# EAGLE board RHD2164_LSS4_AmpAccel (EAGLE 9.3.2)
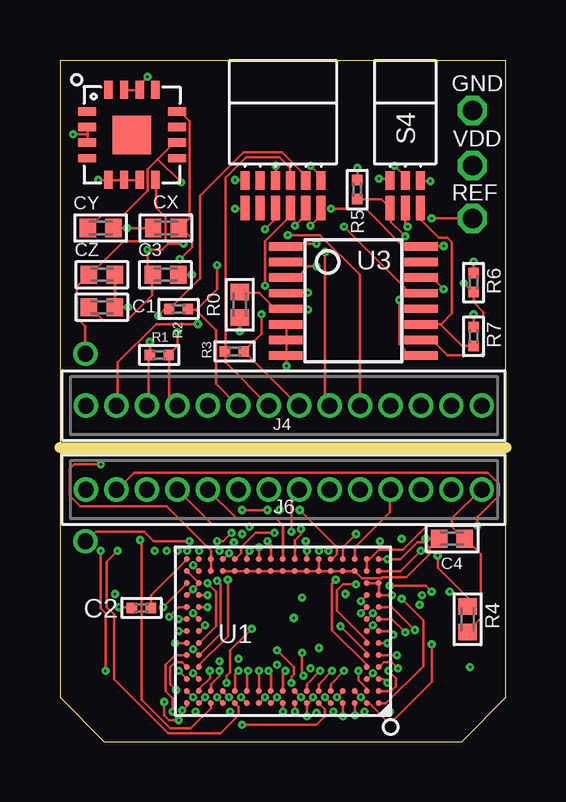
[diagram p0: board, top side]
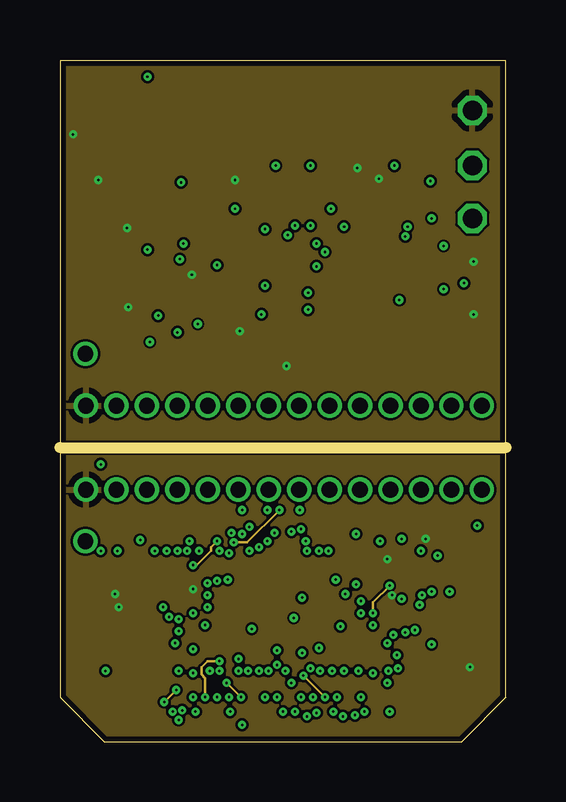
[diagram p1: board, inner layer Route2]
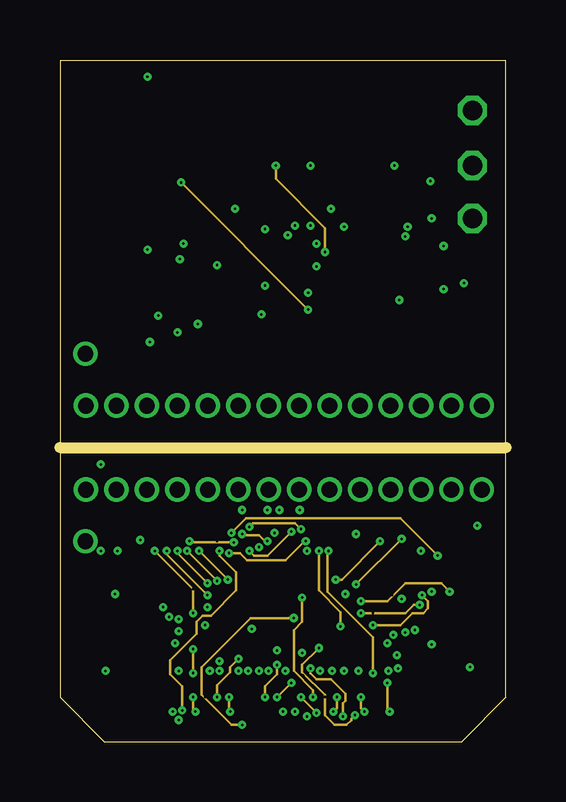
[diagram p2: board, inner layer Route15]
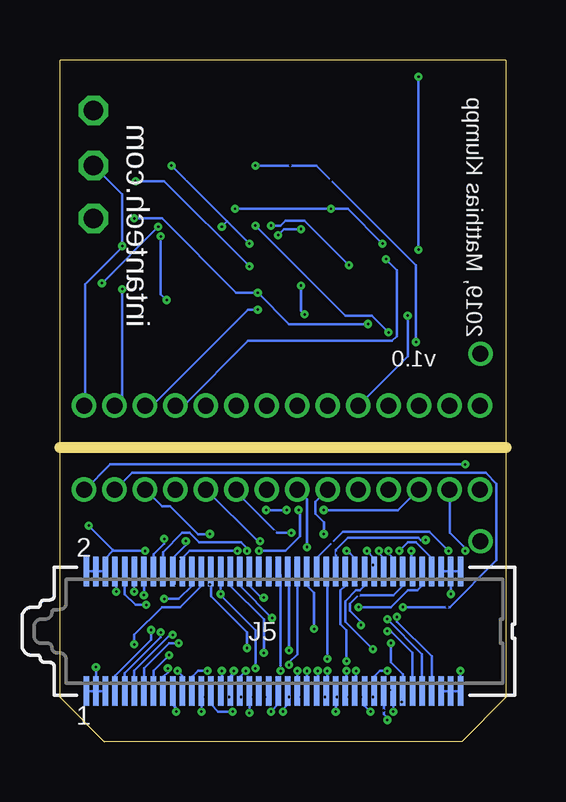
[diagram p3: board, bottom side, seen from below]

Size 18.6 x 28.4 mm. Coordinates in mm from the lower left corner, seen from the top.
Outline: 18.6,1.85 18.6,28.4 0,28.4 0,1.85 1.85,0 16.75,0 18.6,1.85
Copper layers ([2:[15:1*2+15*16]]): Top 0.035mm / dielectric 0.05mm / Route2 0.035mm / dielectric 0.05mm / Route15 0.035mm / dielectric 0.1mm / Bottom 0.035mm
Design rules "default *": minimum track width 0.1mm, minimum drill 0.1mm, track to track 0.1mm, track to pad 0.1mm, pad to pad 0.05mm, via to via 0.05mm, smd to smd 0.05mm, copper to edge 0.2mm, drill to drill 0.3mm, minimum pad ring 0.12mm, minimum via ring 0.12mm, stop-mask expansion 0.12mm, vias tented up to drill 0mil, thermal gap 10mil
Net classes: 1 thick: width 0.102 mm; 2 power: width 0.61 mm
Milling: 1 lines

## Footprints (pad centres in the part's own frame; a part is rotated, then mirrored left to right if it is on the bottom)
0402 = smd 0.686 x 0.762: 1 -0.533,0; 2 0.533,0
0201 = smd 0.432 x 0.432: 1 -0.394,0; 2 0.394,0
TESTPOINT_SMALL = drill 0.813 octagon: 1 0,0
TMS-114-XX-XX-S_REDUCED = drill 0.66 pad 1.016: 1 -7.615,0; 2 -6.345,0; 3 -5.075,0; 4 -3.805,0; 5 -2.535,0; 6 -1.265,0; 7 0.005,0; 8 1.275,0; 9 2.545,0; 10 3.815,0; 11 5.085,0; 12 6.355,0; 13 7.625,0; 14 8.895,0
SS4-40-3.00-X-D = smd 0.23 x 1.23: 1 7.8,2.485; 2 7.8,-2.485; 3 7.4,2.485; 4 7.4,-2.485; 5 7,2.485; 6 7,-2.485; 7 6.6,2.485; 8 6.6,-2.485; 9 6.2,2.485; 10 6.2,-2.485; 11 5.8,2.485; 12 5.8,-2.485; 13 5.4,2.485; 14 5.4,-2.485; 15 5,2.485; 16 5,-2.485; 17 4.6,2.485; 18 4.6,-2.485; 19 4.2,2.485; 20 4.2,-2.485; 21 3.8,2.485; 22 3.8,-2.485; 23 3.4,2.485; 24 3.4,-2.485; 25 3,2.485; 26 3,-2.485; 27 2.6,2.485; 28 2.6,-2.485; 29 2.2,2.485; 30 2.2,-2.485; 31 1.8,2.485; 32 1.8,-2.485; 33 1.4,2.485; 34 1.4,-2.485; 35 1,2.485; 36 1,-2.485; 37 0.6,2.485; 38 0.6,-2.485; 39 0.2,2.485; 40 0.2,-2.485; 41 -0.2,2.485; 42 -0.2,-2.485; 43 -0.6,2.485; 44 -0.6,-2.485; 45 -1,2.485; 46 -1,-2.485; 47 -1.4,2.485; 48 -1.4,-2.485; 49 -1.8,2.485; 50 -1.8,-2.485; 51 -2.2,2.485; 52 -2.2,-2.485; 53 -2.6,2.485; 54 -2.6,-2.485; 55 -3,2.485; 56 -3,-2.485; 57 -3.4,2.485; 58 -3.4,-2.485; 59 -3.8,2.485; 60 -3.8,-2.485; 61 -4.2,2.485; 62 -4.2,-2.485; 63 -4.6,2.485; 64 -4.6,-2.485; 65 -5,2.485; 66 -5,-2.485; 67 -5.4,2.485; 68 -5.4,-2.485; 69 -5.8,2.485; 70 -5.8,-2.485; 71 -6.2,2.485; 72 -6.2,-2.485; 73 -6.6,2.485; 74 -6.6,-2.485; 75 -7,2.485; 76 -7,-2.485; 77 -7.4,2.485; 78 -7.4,-2.485; 79 -7.8,2.485; 80 -7.8,-2.485
OMNETICS_PZN-12-AA = smd 0.381 x 0.762: B1 1.587,-1.016; B2 0.953,-1.016; B3 0.318,-1.016; B4 -0.318,-1.016; B5 -0.953,-1.016; B6 -1.587,-1.016 | smd 0.381 x 1.016: T1 1.587,-2.159; T2 0.953,-2.159; T3 0.318,-2.159; T4 -0.318,-2.159; T5 -0.953,-2.159; T6 -1.587,-2.159
OMNETICS_PZN-06-AA = smd 0.381 x 0.762: B1 0.635,-1.016; B2 0,-1.016; B3 -0.635,-1.016 | smd 0.381 x 1.016: T1 0.635,-2.159; T2 0,-2.159; T3 -0.635,-2.159
BGA104_9X7 = smd 0.25 x 0.25: A1 -4,3; A2 -3.5,3; A3 -3,3; A4 -2.5,3; A5 -2,3; A6 -1.5,3; A7 -1,3; A8 -0.5,3; A9 0,3; A10 0.5,3; A11 1,3; A12 1.5,3; A13 2,3; A14 2.5,3; A15 3,3; A16 3.5,3; A17 4,3; B1 -4,2.5; B2 -3.5,2.5; B3 -3,2.5; B4 -2.5,2.5; B5 -2,2.5; B6 -1.5,2.5; B7 -1,2.5; B8 -0.5,2.5; B9 0,2.5; B10 0.5,2.5; B11 1,2.5; B12 1.5,2.5; B13 2,2.5; B14 2.5,2.5; B15 3,2.5; B16 3.5,2.5; B17 4,2.5; C1 -4,2; C2 -3.5,2; C16 3.5,2; C17 4,2; D1 -4,1.5; D2 -3.5,1.5; D16 3.5,1.5; D17 4,1.5; E1 -4,1; E2 -3.5,1; E16 3.5,1; E17 4,1; F1 -4,0.5; F2 -3.5,0.5; F16 3.5,0.5; F17 4,0.5; G1 -4,0; G2 -3.5,0; G16 3.5,0; G17 4,0; H1 -4,-0.5; H2 -3.5,-0.5; H16 3.5,-0.5; H17 4,-0.5; J1 -4,-1; J2 -3.5,-1; J16 3.5,-1; J17 4,-1; K1 -4,-1.5; K2 -3.5,-1.5; K16 3.5,-1.5; K17 4,-1.5; L1 -4,-2; L2 -3.5,-2; L16 3.5,-2; L17 4,-2; M1 -4,-2.5; M2 -3.5,-2.5; M3 -3,-2.5; M4 -2.5,-2.5; M5 -2,-2.5; M6 -1.5,-2.5; M7 -1,-2.5; M8 -0.5,-2.5; M9 0,-2.5; M10 0.5,-2.5; M11 1,-2.5; M12 1.5,-2.5; M13 2,-2.5; M14 2.5,-2.5; M15 3,-2.5; M16 3.5,-2.5; M17 4,-2.5; N1 -4,-3; N2 -3.5,-3; N3 -3,-3; N4 -2.5,-3; N5 -2,-3; N6 -1.5,-3; N7 -1,-3; N8 -0.5,-3; N9 0,-3; N10 0.5,-3; N11 1,-3; N12 1.5,-3; N13 2,-3; N14 2.5,-3; N15 3,-3; N16 3.5,-3; N17 4,-3
ADXL335_IDAX = smd 0.75 x 0.35: 1 -1.875,0.975; 2 -1.875,0.325; 3 -1.875,-0.325; 4 -1.875,-0.975; 9 1.875,-0.975; 10 1.875,-0.325; 11 1.875,0.325; 12 1.875,0.975 | smd 0.35 x 0.75: 5 -0.975,-1.875; 6 -0.325,-1.875; 7 0.325,-1.875; 8 0.975,-1.875; 13 0.975,1.875; 14 0.325,1.875; 15 -0.325,1.875; 16 -0.975,1.875 | smd 1.6 x 1.6: CENTER 0,0
TSSOP-16 = smd 0.348 x 1.397: 1 -2.273,-2.814; 2 -1.623,-2.815; 3 -0.973,-2.815; 4 -0.323,-2.815; 5 0.327,-2.815; 6 0.977,-2.815; 7 1.627,-2.815; 8 2.277,-2.815; 9 2.277,2.825; 10 1.627,2.825; 11 0.977,2.825; 12 0.327,2.825; 13 -0.323,2.825; 14 -0.973,2.825; 15 -1.623,2.825; 16 -2.273,2.825
PIN_HOLE = drill 0.66 pad 1.016: 1 0.015,0

## Placement (x,y rotation side)
C1  100n  [0402]  1.75,18.1 0 top
C2  10n  [0201]  3.4,5.57 180 top
C3  100n  [0402]  4.4,19.45 0 top
C4  100n  [0402]  16.35,8.45 180 top
CX  27n  [0402]  4.42,21.4 180 top
CY  27n  [0402]  1.7,21.4 0 top
CZ  27n  [0402]  1.75,19.45 0 top
GND  TESTPOINT_SMALL  [TESTPOINT_SMALL]  17.2,26.3 0 top
J4  TMS-114-XX-XX-S_REDUCED  [TMS-114-XX-XX-S_REDUCED]  8.7,14 0 top
J5  SS4-40-3.00-X-D  [SS4-40-3.00-X-D]  9.7,4.6 180 bottom
J6  TMS-114-XX-XX-S_REDUCED  [TMS-114-XX-XX-S_REDUCED]  8.7,10.5 0 top
R0  0  [0402]  7.5,18.2 90 top
R1  100  [0201]  4.14,16.11 0 top
R2  100  [0201]  4.95,18.03 0 top
R3  100  [0201]  7.27,16.26 0 top
R4  0  [0402]  17,5.1 90 top
R5  100k  [0201]  12.4,23 270 top
R6  100k  [0201]  17.24,19.13 270 top
R7  100k  [0201]  17.24,16.88 270 top
REF  TESTPOINT_SMALL  [TESTPOINT_SMALL]  17.2,21.8 0 top
S2  RHD2000-CABLE-AMP-SIDE  [OMNETICS_PZN-12-AA]  9.3,24.4 0 top
S4  OMNETICS_PZN-06_SMD  [OMNETICS_PZN-06-AA]  14.4,24.4 0 top
U1  RHD2164_BGA_BGA  [BGA104_9X7]  9.3,4.6 180 top
U2  ADXL335_IDAX  [ADXL335_IDAX]  3,25.28 0 top
U3  74HC4053_TSSOP-16  [TSSOP-16]  12.24,18.36 270 top
U$1  PIN_HOLE  [PIN_HOLE]  1.05,16.16 0 top
U$2  PIN_HOLE  [PIN_HOLE]  1.05,8.35 0 top
VDD  TESTPOINT_SMALL  [TESTPOINT_SMALL]  17.2,24 0 top

## Library data of the parts
C1-C4 CX CY CZ GND R0 R1-R7 REF VDD = RHD2000_eval_board
J4 J6 = TMS-108+114-XX-XX-S
J5 = SS4-40-3.00-X-D_custom
S2 S4 = RHD2000
U1 = INTAN
U2 U3 = harrison
U$1 U$2 = Various

## Nets
CS-: J4.3 R1.1 S2.B1
ELEC_TEST1: J4.13 U3.14
GND [thick]: C1.2 C3.2 CX.2 CY.2 CZ.2 GND.1 J4.1 R0.1 R5.1 R6.1 R7.1 S2.B6 S4.B3 U2.2 U2.3 U2.5 U2.6 U2.7 U3.6 U3.7 U3.8
GND_B [thick]: C2.2 C4.2 J5.1 J5.3 J5.5 J5.76 J5.78 J5.80 J6.1 U1.K1 U1.K17 U1.L1 U1.L2 U1.L16 U1.M3 U1.M4 U1.M5 U1.M6 U1.M7 U1.M8 U1.M9 U1.M10 U1.M11 U1.M12 U1.M13 U1.M14 U1.M17 U1.N1 U1.N6
N$1: C2.1 U1.N17
N$2: J5.8 U1.K2
N$3: J5.7 U1.J1
N$4: J5.10 U1.J2
N$5: J5.9 U1.H1
N$6: J5.12 U1.H2
N$7: J5.11 U1.G1
N$8: J5.14 U1.G2
N$9: J5.13 U1.F1
N$10: J6.4 U1.N8
N$11 [thick]: R0.2 U3.5
N$13: J6.6 U1.N10
N$15: J6.8 U1.N12
N$16: J6.9 U1.N13
N$17: J6.10 U1.N14
N$18: J5.16 U1.F2
N$19: J5.15 U1.E1
N$20: J5.18 U1.E2
N$21: J5.17 U1.D1
N$22: J5.20 U1.D2
N$23: J5.19 U1.C1
N$24: J5.22 U1.C2
N$25: J5.21 U1.B1
N$26: J5.24 U1.A1
N$27: J5.23 U1.B2
N$28: J5.26 U1.A2
N$29: J5.25 U1.B3
N$30: J5.74 U1.K16
N$31: J5.73 U1.J17
N$32: J5.72 U1.J16
N$33: J5.71 U1.H17
N$34: J5.70 U1.H16
N$35: J4.4 R1.2 S2.T1
N$36: J4.5 R2.1 S2.B2
N$37: J4.6 R2.2 S2.T2
N$38: J4.7 R3.1 S2.B3
N$39: J4.8 R3.2 S2.T3
N$40: J4.9 S2.B4
N$41: J5.69 U1.G17
N$42: R4.2 U1.M16
N$43: J5.68 U1.G16
N$44: J5.67 U1.F17
N$45: J5.66 U1.F16
N$46: J5.65 U1.E17
N$47: J5.64 U1.E16
N$48: J5.63 U1.D17
N$49: J5.62 U1.D16
N$50: J5.61 U1.C17
N$51: J5.60 U1.C16
N$52: J5.59 U1.B17
N$53: J5.58 U1.A17
N$54: J5.57 U1.B16
N$55: J5.56 U1.A16
N$56: J5.55 U1.B15
N$57: J5.54 U1.A15
N$58: J5.53 U1.B14
N$59: J5.52 U1.A14
N$60: J5.51 U1.B13
N$61: J5.28 U1.A3
N$62: J5.27 U1.B4
N$63: J5.30 U1.A4
N$64: J5.29 U1.B5
N$65: J5.32 U1.A5
N$66: J5.31 U1.B6
N$67: J5.34 U1.A6
N$68: J5.33 U1.B7
N$69: J5.50 U1.A13
N$70: J5.49 U1.B12
N$71: J5.48 U1.A12
N$72: J5.47 U1.B11
N$73: J5.46 U1.A11
N$74: J5.45 U1.B10
N$75: J5.44 U1.A10
N$76: J5.43 U1.A9
N$77: J5.42 U1.B9
N$78: J5.41 U1.A8
N$79: J5.36 U1.A7
N$80: J5.35 U1.B8
N$81: J4.10 S2.T4
N$82: J6.13 U1.L17
N$83: J6.11 U1.N3
N$84: J6.12 U1.N4
N$85: U1.N5 U$2.1
N$86: J6.3 U1.N7
N$87: J6.5 U1.N9
N$88: J6.7 U1.N11
N$131: R7.2 S4.T1 U3.11
N$132: R6.2 S4.T2 U3.10
N$133: R5.2 S4.T3 U3.9
N$135 [thick]: S4.B1 U3.3
N$136: S4.B2 U3.1 U3.13
REF [thick]: J5.2 J5.4 J5.6 J5.75 J5.77 J5.79 J6.2 U1.M1
REF_A: J4.2 REF.1 U3.4
VCC [thick]: C1.1 C3.1 J4.14 S2.T6 U2.14 U2.15 U3.16 VDD.1
VCC_B: C4.1 J6.14 R4.1 U1.M2 U1.M15 U1.N2 U1.N15
XOUT: CX.1 J4.11 U2.12
YOUT: CY.1 J4.12 U2.10
ZOUT: CZ.1 U2.8 U$1.1

## Tracks (layer width: path | path; a pad name or v marks a point on that pad's centre or on a via)
CS-  (via drill 0.1)
  Top 0.1: J4.3 3.65,14 3.7,14.05 3.7,16.1 R1.1 3.75,16.15 v3.75,16.65 | v10.45,24 10.85,23.6 10.85,23.4 S2.B1
  Bottom 0.1: v10.45,24 7.9,24 3.75,19.85 v3.75,16.65
ELEC_TEST1  (via drill 0.1)
  Top 0.1: v16,18.85 15.55,19.3 15.1,19.3 U3.14
  Bottom 0.1: v16,18.85 16,14.3 16.3,14 J4.13
GND  (via drill 0.1 layers 1-2)
  Top 0.102: U3.6 9.45,17.35 9.45,16.75 U3.7 9.45,16.7 9.45,16.1 U3.8 9.45,16.05 v9.45,15.65 | U2.7 3.3,23.4 2.7,23.4 U2.6 2.65,23.4 2.05,23.4 U2.5 2,23.4 v1.6,23.4 | 1.15,25.3 1.15,25.6 U2.2 | 1.15,25.3 1.15,25 U2.3 | v17.25,17.8 R7.1 | v17.25,20 R6.1 | v12.4,23.9 R5.1 | v2.85,18.1 C1.2 2.3,18.15 2.3,19.45 CZ.2 | v5.5,19.45 C3.2 | CY.2 v2.8,21.4 CX.2 | v7.5,17.1 R0.1 | v7.3,23.4 7.7,23.4 S2.B6 | v13.3,23.45 13.7,23.45 S4.B3 | v0.55,25.3 1.15,25.3
  pour Route2: 0.1,12.6 0.1,28.3 18.5,28.3 18.5,12.6
GND_B  (via drill 0.1, 0.1 layers 1-2)
  Top 0.102: U1.M14 U1.M13 U1.M12 U1.M11 U1.M10 U1.M9 U1.M8 U1.M7 U1.M6 | U1.M6 U1.M5 U1.M4 U1.M3 | U1.M6 U1.N6 | U1.M17 U1.L16 v5.55,6.35 U1.K17 | U1.L1 U1.K1 v13.85,6.1 | 13.3,6.65 U1.L1 | v2.45,5.6 3,5.6 C2.2 | v15.25,8.45 C4.2 | 12.35,7.1 U1.M3 | U1.M3 12.6,6.8 13.4,6.8 13.45,6.85 14.45,6.85 15.4,7.8 15.4,8.1 15.2,8.3 14.9,8.3 14.2,7.6 v13.65,7.6 U1.N1 | U1.L1 U1.L2
  Bottom 0.102: J5.5 J5.3 | J5.1 17.15,2.1 J5.3 | J5.80 1.9,7.1 2.3,7.1 J5.78 | J5.76 2.7,7.1 2.35,7.1 J5.78 | J5.78 v2.3,6.15 | J5.3 v17.1,3.1
  pour Route2: 0.1,11.9 0.1,1.9 1.9,0.1 16.7,0.1 18.5,1.9 18.5,11.9
N$1
  Top 0.1: U1.N17 3.8,6.1 3.8,5.6 C2.1
N$2  (via drill 0.1, 0.1 layers 1-15)
  Top 0.1: v12.55,5.85 U1.K2
  Route15 0.1: v12.55,5.85 13.65,5.85 14.4,6.6 15.9,6.6 v16.25,6.25
  Bottom 0.1: v16.25,6.25 16.25,7 16.3,7.05 J5.8
N$3  (via drill 0.1)
  Top 0.1: U1.J1 13.85,5.6 v14.8,4.65
  Bottom 0.1: v14.8,4.65 14.8,4.25 16.3,2.75 J5.7
N$4  (via drill 0.1, 0.1 layers 1-15)
  Top 0.1: v12.55,5.35 U1.J2
  Route15 0.1: v12.55,5.35 14.4,5.35 14.75,5.7 v15,5.7
  Bottom 0.1: v15,5.7 15.45,5.7 15.9,6.15 J5.10
N$5  (via drill 0.1)
  Top 0.1: U1.H1 13.85,5.1 v14.4,4.55
  Bottom 0.1: v14.4,4.55 14.4,4.35 15.9,2.85 J5.9
N$6  (via drill 0.1, 0.1 layers 1-2)
  Top 0.1: v13.05,5.35 U1.H2 | v13.75,6.5 15.25,6.5 v15.5,6.25
  Route2 0.1: v13.05,5.35 13.05,5.8 v13.75,6.5
  Bottom 0.1: J5.12 v15.5,6.25
N$7  (via drill 0.1)
  Top 0.1: U1.G1 13.75,4.6 v13.9,4.45
  Bottom 0.1: v13.9,4.45 14,4.45 15.5,2.95 J5.11
N$8  (via drill 0.1, 0.1 layers 1-15)
  Top 0.1: v13.05,4.85 U1.G2
  Route15 0.1: v13.05,4.85 14.2,4.85 14.7,5.35 15.15,5.35 15.35,5.55 15.35,5.85 v15.1,6.1
  Bottom 0.1: J5.14 v15.1,6.1
N$9  (via drill 0.1)
  Top 0.1: v13.65,4.1 U1.F1
  Bottom 0.1: v13.65,4.1 14.05,4.1 15.1,3.05 J5.13
N$10  (via drill 0.1 layers 1-15)
  Top 0.1: U1.N8 9.8,8.4 10.05,8.65 v10.05,8.85 | v7.9,8.95 7.8,8.95 7.7,9.05 6.35,9.05 J6.4
  Route15 0.1: v10.05,8.85 9.8,9.1 8.05,9.1 v7.9,8.95
N$11
  Top 0.102: R0.2 7.5,18.7 8.3,18.7 8.95,18.05 9.4,18.05 U3.5
N$13  (via drill 0.1, 0.1 layers 1-15)
  Top 0.1: U1.N10 8.8,8.2 v8.65,8.35
  Route15 0.1: v8.65,8.35 8.55,8.35 8.3,8.6 7.65,8.6 v7.6,8.65
  Bottom 0.1: v7.6,8.65 7.6,9.15 7.95,9.5 7.95,10 7.45,10.5 J6.6
N$15  (via drill 0.1 layers 1-15)
  Top 0.1: U1.N12 7.8,7.85 v7.9,7.95 | v9.65,8.75 9.65,10.2 9.95,10.5 J6.8
  Route15 0.1: v7.9,7.95 8.1,7.75 8.65,7.75 v9.65,8.75
N$16  (via drill 0.1)
  Top 0.1: U1.N13 7.55,7.85 7.55,8.1 8.15,8.7 v8.95,8.7
  Bottom 0.1: v8.95,8.7 9.55,8.7 11.2,10.35 11.2,10.5 J6.9
N$17  (via drill 0.1, 0.1 layers 1-15)
  Top 0.1: v7.05,7.85 U1.N14
  Route15 0.1: v7.05,7.85 7.5,7.85 7.8,7.55 9.4,7.55 10.2,8.35 v10.25,8.35
  Bottom 0.1: v10.25,8.35 10.35,8.35 J6.10
N$18  (via drill 0.1, 0.1 layers 1-15)
  Top 0.1: U1.F2 12.8,4.2 11.55,5.45 11.55,6.3 11.8,6.55 v12.35,6.55
  Route15 0.1: v14.25,8.45 v12.35,6.55
  Bottom 0.1: v14.25,8.45 14.25,8.25 14.7,7.8 J5.16
N$19  (via drill 0.1)
  Top 0.1: v14.05,3.6 U1.E1
  Bottom 0.1: v14.05,3.6 14.7,2.95 J5.15
N$20  (via drill 0.1, 0.1 layers 1-15)
  Top 0.1: U1.E2 12.8,3.7 v11.7,4.8
  Route15 0.1: v11.7,4.8 11.7,5.4 10.8,6.3 v10.8,7.95
  Bottom 0.1: v10.8,7.95 10.8,8.05 11.05,8.3 12.8,8.3 13.2,8.7 13.5,8.7 14.3,7.9 J5.18
N$21  (via drill 0.1)
  Top 0.1: U1.D1 13.5,3.3 13.85,3.3 v14.1,3.05
  Bottom 0.1: v14.1,3.05 14.1,2.9 14.3,2.7 J5.17
N$22  (via drill 0.1, 0.1 layers 1-15)
  Top 0.1: U1.D2 12.8,3.2 11.35,4.65 11.35,6.6 v11.5,6.75
  Route15 0.1: v11.5,6.75 11.75,6.75 v13.35,8.35
  Bottom 0.1: v13.35,8.35 13.35,8.2 13.9,7.65 J5.20
N$23  (via drill 0.1, 0.1 layers 1-15)
  Top 0.1: U1.C1 13.5,2.6 v13.65,2.45
  Route15 0.1: v13.65,2.45 13.65,1.35 v13.75,1.25
  Bottom 0.1: v13.75,1.25 13.75,1.4 13.9,1.55 J5.19
N$24  (via drill 0.1, 0.1 layers 1-15)
  Top 0.1: v13.05,2.85 U1.C2
  Route15 0.1: v13.05,2.85 13.05,4.35 11.15,6.25 11.15,7.9 v11.2,7.95
  Bottom 0.1: v11.2,7.95 13.2,7.95 13.5,7.65 J5.22
N$25  (via drill 0.1)
  Top 0.1: U1.B1 13.8,2.1 14,2.3 14,2.65 v13.7,2.95
  Bottom 0.1: v13.7,2.95 13.5,2.75 J5.21
N$26  (via drill 0.1)
  Top 0.1: U1.A1 13.6,1.6 15.15,3.15 15.15,5.05 v14.25,5.95
  Bottom 0.1: v14.25,5.95 13.65,5.95 13.1,6.5 J5.24
N$27  (via drill 0.1)
  Top 0.1: U1.B2 12.8,2.2 12.45,2.55 v12.45,2.95
  Bottom 0.1: v12.45,2.95 12.85,2.95 13.1,2.7 J5.23
N$28  (via drill 0.1)
  Top 0.1: U1.A2 12.9,1.6 13.6,0.9 13.9,0.9 15.5,2.5 v15.5,4.05
  Bottom 0.1: v15.5,4.05 15.5,4.45 14.35,5.6 13.6,5.6 12.7,6.5 J5.26
N$29  (via drill 0.1, 0.1 layers 1-15)
  Top 0.1: v12.55,1.85 U1.B3
  Route15 0.1: v12.55,1.85 12.55,1.4 v12.7,1.25
  Bottom 0.1: J5.25 v12.7,1.25
N$30  (via drill 0.1, 0.1 layers 1-15)
  Top 0.1: v6.15,6.1 U1.K16
  Route15 0.1: v6.15,6.1 4.45,7.8 v4.45,7.95
  Bottom 0.1: v4.45,7.95 4.1,8.3 3.75,8.3 3.1,7.65 J5.74
N$31  (via drill 0.1)
  Top 0.1: U1.J17 4.95,5.6 v4.55,5.2
  Bottom 0.1: v4.55,5.2 4.55,5 3.1,3.55 J5.73
N$32  (via drill 0.1)
  Top 0.1: v6.15,5.6 U1.J16
  Bottom 0.1: v6.15,5.6 4.8,5.6 4.1,6.3 3.7,6.3 3.5,6.5 J5.72
N$33  (via drill 0.1)
  Top 0.1: v4.95,5.1 U1.H17
  Bottom 0.1: v4.95,5.1 3.5,3.65 J5.71
N$34  (via drill 0.1, 0.1 layers 1-15)
  Top 0.1: v5.55,5.35 U1.H16
  Route15 0.1: v5.55,5.35 5.55,6.35 v3.95,7.95
  Bottom 0.1: v3.95,7.95 3.95,7.15 3.9,7.1 J5.70
N$35  (via drill 0.1)
  Top 0.1: J4.4 4.85,14 4.55,14.3 4.55,16.1 R1.2 4.55,16.15 4.9,16.5 v4.9,17.05 | v10.45,21.5 10.85,21.9 10.85,22.2 S2.T1
  Bottom 0.1: v10.45,21.5 6.7,17.75 5.6,17.75 v4.9,17.05
N$36  (via drill 0.1)
  Top 0.1: v4.1,17.75 4.35,18 4.55,18 R2.1 4.6,18.05 5.85,19.3 5.85,22.75 7.65,24.55 9.25,24.55 10.25,23.55 10.25,23.4 S2.B2
  Bottom 0.1: v4.1,17.75 4.1,16.05 J4.5
N$37  (via drill 0.1)
  Top 0.1: 5.67,17.98 6.5,17.15 6.5,14.9 7.4,14 J4.6 | 5.67,17.98 5.65,18 5.35,18 R2.2 | v9.8,21.5 10.25,21.95 10.25,22.2 S2.T2 | v6.55,19.85 6.55,18.85 5.67,17.98
  Bottom 0.1: v9.8,21.5 9.4,21.5 9.2,21.7 8.4,21.7 v6.55,19.85
N$38
  Top 0.1: J4.7 6.9,15.8 6.9,16.25 R3.1 6.9,16.3 6.9,23.5 7.75,24.35 9.15,24.35 9.6,23.9 9.6,23.4 S2.B3
N$39  (via drill 0.1)
  Top 0.1: J4.8 9.95,14 7.7,16.25 R3.2 7.7,16.3 8.4,17 v8.4,17.8 | v8.55,19 8.55,20.85 9.6,21.9 9.6,22.2 S2.T3
  Bottom 0.1: v8.55,19 8.55,17.95 v8.4,17.8
N$40  (via drill 0.1 layers 1-15)
  Top 0.1: v9,24 9,23.4 S2.B4 | v11.05,20.4 11.05,14.15 11.2,14 J4.9
  Route15 0.1: v9,24 9,23.45 11.05,21.4 v11.05,20.4
N$41  (via drill 0.1)
  Top 0.1: v4.95,4.6 U1.G17
  Bottom 0.1: v4.95,4.6 4.8,4.6 3.9,3.7 J5.69
N$42  (via drill 0.1 layers 1-15, 0.1 layers 1-2)
  Top 0.1: v5.55,7.35 U1.M16 | v6.55,8.35 6.8,8.35 v7.15,8.7 | v15.75,7.75 15.75,7.25 17,6 R4.2
  Route2 0.1: v5.55,7.35 5.7,7.35 6.3,7.95 6.3,8.1 v6.55,8.35
  Route15 0.1: v7.15,8.7 7.75,9.3 14.2,9.3 v15.75,7.75
N$43  (via drill 0.1)
  Top 0.1: v6.05,4.85 U1.G16
  Bottom 0.1: v6.05,4.85 6.05,5 6.5,5.45 6.5,5.75 6.15,6.1 4.7,6.1 4.3,6.5 J5.68
N$44  (via drill 0.1)
  Top 0.1: v4.8,4.1 U1.F17
  Bottom 0.1: v4.8,4.1 4.8,3.3 4.3,2.8 J5.67
N$45  (via drill 0.1, 0.1 layers 1-15)
  Top 0.1: U1.F16 6.5,4.8 6.5,6.25 v6.15,6.6
  Route15 0.1: v6.15,6.6 4.9,7.85 v4.9,7.95
  Bottom 0.1: v4.9,7.95 4.9,7.85 4.7,7.65 J5.66
N$46  (via drill 0.1)
  Top 0.1: U1.E17 4.8,3.6 4.4,3.2 4.4,2.1 4.7,1.8 v4.7,1.25
  Bottom 0.1: J5.65 v4.7,1.25
N$47  (via drill 0.1, 0.1 layers 1-15)
  Top 0.1: U1.E16 6.7,4.5 6.7,6.55 v6.55,6.7
  Route15 0.1: v5.3,7.95 v6.55,6.7
  Bottom 0.1: v5.3,7.95 5.3,7.85 5.1,7.65 J5.64
N$48  (via drill 0.1, 0.1 layers 1-2)
  Top 0.1: U1.D17 5.1,3.3 4.8,3.3 4.6,3.1 4.6,2.4 v4.85,2.15 | v4.35,1.65 4.35,1.1 4.55,0.9 v4.95,0.9
  Route2 0.1: v4.35,1.65 v4.85,2.15
  Bottom 0.1: v4.95,0.9 4.95,1 5.1,1.15 J5.63
N$49  (via drill 0.1, 0.1 layers 1-15)
  Top 0.1: U1.D16 5.8,3.2 7,4.4 v7,6.75
  Route15 0.1: v5.8,7.95 v7,6.75
  Bottom 0.1: v5.8,7.95 5.5,7.65 J5.62
N$50  (via drill 0.1)
  Top 0.1: v4.95,2.95 U1.C17
  Bottom 0.1: v4.95,2.95 5.25,2.95 5.5,2.7 J5.61
N$51  (via drill 0.1, 0.1 layers 1-15)
  Top 0.1: v5.55,2.85 U1.C16
  Route15 0.1: v5.55,3.85 v5.55,2.85
  Bottom 0.1: v5.55,3.85 6.7,5 6.7,5.85 6.25,6.3 6.1,6.3 5.9,6.5 J5.60
N$52  (via drill 0.1, 0.1 layers 1-15)
  Top 0.1: v5.55,1.85 U1.B17
  Route15 0.1: v5.55,1.85 5.55,1.35 v5.65,1.25
  Bottom 0.1: v5.65,1.25 5.9,1.5 J5.59
N$53  (via drill 0.1, 0.1 layers 1-15)
  Top 0.1: U1.A17 5.3,1.5 v5.1,1.3
  Route15 0.1: v5.1,1.3 5.1,2.3 4.6,2.8 4.6,3.4 5.7,4.5 5.7,5 5.95,5.25 6.3,5.25 7.35,6.3 7.35,7.05 6.65,7.75 v6.65,7.95
  Bottom 0.1: v6.65,7.95 6.55,7.85 6.5,7.85 6.3,7.65 J5.58
N$54  (via drill 0.1)
  Top 0.1: U1.B16 5.8,2.2 6.25,2.65 v6.25,2.95
  Bottom 0.1: v6.25,2.95 6.25,2.2 6.3,2.15 J5.57
N$55  (via drill 0.1, 0.1 layers 1-2)
  Top 0.1: v6.05,1.85 U1.A16
  Route2 0.1: v6.05,1.85 6.05,2.65 5.9,2.8 5.9,3.1 6.15,3.35 v6.65,3.35
  Bottom 0.1: v6.65,3.35 6.65,4.65 6.9,4.9 6.9,6.3 6.7,6.5 J5.56
N$56  (via drill 0.1)
  Top 0.1: U1.B15 6.3,2.4 6.65,2.75 v6.65,2.95
  Bottom 0.1: v6.65,2.95 6.65,2.2 6.7,2.15 J5.55
N$57  (via drill 0.1)
  Top 0.1: U1.A15 6.3,1.4 5.45,0.55 4.6,0.55 3.4,1.75 3.4,8.35 v3.35,8.4
  Bottom 0.1: v3.35,8.4 3.55,8.4 3.65,8.5 6.6,8.5 7.1,8 J5.54
N$58  (via drill 0.1, 0.1 layers 1-15)
  Top 0.1: v7.05,1.85 U1.B14
  Route15 0.1: v7.05,1.85 7.05,1.3 v7.1,1.25
  Bottom 0.1: J5.53 v7.1,1.25
N$59  (via drill 0.1, 0.1 layers 1-15)
  Top 0.1: v6.55,1.85 U1.A14
  Route15 0.1: v6.55,1.85 6.55,2.35 7.1,2.9 7.1,3.1 v7.45,3.45
  Bottom 0.1: v7.45,3.45 7.45,7 7.5,7.05 J5.52
N$60  (via drill 0.1)
  Top 0.1: U1.B13 7.3,2.8 v7.45,2.95
  Bottom 0.1: v7.45,2.95 7.45,2.2 7.5,2.15 J5.51
N$61  (via drill 0.1, 0.1 layers 1-15)
  Top 0.102: U1.A3 v12.3,1.1
  Route15 0.1: v12.3,1.1 12.15,0.95 12.15,0.9 11.95,0.7 11.45,0.7 11.05,1.1 11.05,1.95 10.1,2.9 10.1,3.2 v10.8,3.9
  Bottom 0.1: v10.8,3.9 10.8,4.55 12.3,6.05 J5.28
N$62  (via drill 0.1, 0.1 layers 1-15)
  Top 0.1: v11.55,1.85 U1.B4
  Route15 0.1: v11.55,1.85 11.55,1.4 v11.4,1.25
  Bottom 0.1: v11.4,1.25 12,1.25 12.3,1.55 J5.27
N$63  (via drill 0.1, 0.1 layers 1-15)
  Top 0.102: U1.A4 v11.8,1.05
  Route15 0.1: v11.8,1.05 U1.A4 11.9,1.7 11.9,2 11.3,2.6 10.7,2.6 10.45,2.85 v10.45,3.05
  Bottom 0.1: v10.45,3.05 10.45,4.65 11.9,6.1 v11.9,6.15
  Bottom 0.102: v11.9,6.15 J5.30
N$64  (via drill 0.1)
  Top 0.1: U1.B5 11.3,2.4 v11.85,2.95
  Bottom 0.1: v11.85,2.95 11.85,2.2 11.9,2.15 J5.29
N$65  (via drill 0.1, 0.1 layers 1-2)
  Top 0.1: v11.05,1.85 U1.A5 | v10.15,2.75 10.15,2.85 10.1,2.9 v10.1,3.7
  Route2 0.1: v10.15,2.75 v11.05,1.85
  Bottom 0.1: v10.1,3.7 10.1,5.1 11.5,6.5 J5.32
N$66  (via drill 0.1)
  Top 0.1: U1.B6 10.8,2.4 v11.35,2.95
  Bottom 0.1: v11.35,2.95 11.35,2.85 11.5,2.7 J5.31
N$67  (via drill 0.1, 0.1 layers 1-15)
  Top 0.1: U1.A6 11.05,1.35 11.05,1.05 10.7,0.7 v7.6,0.7
  Route15 0.1: v7.6,0.7 7.15,0.7 5.9,1.95 5.9,3.1 7.95,5.15 v9.75,5.15
  Bottom 0.1: v9.75,5.15 11.1,6.5 J5.34
N$68  (via drill 0.1)
  Top 0.1: U1.B7 10.3,2.4 v10.85,2.95
  Bottom 0.1: v10.85,2.95 11.1,2.7 J5.33
N$69  (via drill 0.1)
  Top 0.1: U1.A13 7.45,1.45 7.45,1.1 6.7,0.35 4.5,0.35 2.25,2.6 2.25,5.3 1.95,5.6 1.95,7.5 v2.4,7.95
  Bottom 0.1: v2.4,7.95 3.2,8.75 6.8,8.75 7.9,7.65 J5.50
N$70  (via drill 0.1)
  Top 0.1: U1.B12 7.8,2.9 v7.85,2.95
  Bottom 0.1: v7.85,2.95 7.85,2.2 7.9,2.15 J5.49
N$71  (via drill 0.1, 0.1 layers 1-2)
  Top 0.1: v7.55,1.85 U1.A12 | v6.95,2.45 6.95,2.75 7.1,2.9 7.1,3.8 v8,4.7
  Route2 0.1: v6.95,2.45 v7.55,1.85
  Bottom 0.1: v8,4.7 8,6.2 8.3,6.5 J5.48
N$72  (via drill 0.1)
  Top 0.1: v8.3,2.95 U1.B11
  Bottom 0.1: J5.47 v8.3,2.95
N$73  (via drill 0.1, 0.1 layers 1-15)
  Top 0.1: v8.55,1.85 U1.A11
  Route15 0.1: v8.55,1.85 8.55,2.3 9.05,2.8 v9.05,3.2
  Bottom 0.1: v9.05,3.2 9.05,3.3 8.7,3.65 J5.46
N$74  (via drill 0.1)
  Top 0.1: U1.B10 8.8,2.85 v8.7,2.95
  Bottom 0.1: J5.45 v8.7,2.95
N$75  (via drill 0.1, 0.1 layers 1-15)
  Top 0.1: v9.05,1.85 U1.A10 | v9.65,2.45 9.65,2.7 9.75,2.8 9.75,3.1 v9.05,3.8
  Route15 0.1: v9.65,2.45 v9.05,1.85
  Bottom 0.1: v9.05,3.8 9.05,7 9.1,7.05 J5.44
N$76  (via drill 0.1)
  Top 0.1: v9.3,1.25 U1.A9
  Bottom 0.1: v9.3,1.25 9.3,1.35 9.1,1.55 J5.43
N$77  (via drill 0.1)
  Top 0.1: U1.B9 9.3,2.85 v9.4,2.95
  Bottom 0.1: v9.4,2.95 9.4,6.95 9.5,7.05 J5.42
N$78  (via drill 0.1)
  Top 0.1: v9.8,1.25 U1.A8
  Bottom 0.1: v9.8,1.25 9.5,1.55 J5.41
N$79  (via drill 0.1, 0.1 layers 1-15)
  Top 0.1: v10.55,1.85 10.55,1.8 10.35,1.6 U1.A7
  Top 0.102: U1.A7 v10.3,1.05
  Route15 0.1: v10.55,1.85 10.55,2.15 9.75,2.95 9.75,4.65 10.1,5 v10.1,6
  Bottom 0.1: v10.1,6 10.2,6 10.7,6.5 J5.36
N$80  (via drill 0.1, 0.1 layers 1-15)
  Top 0.1: v10.05,1.85 U1.B8
  Route15 0.1: v10.7,1.2 v10.05,1.85
  Bottom 0.1: J5.35 v10.7,1.2
N$81  (via drill 0.1)
  Top 0.1: v8.55,21.35 8.95,21.75 8.95,22.2 S2.T4 | v9.5,21.1 10.85,21.1 12.5,19.45 J4.10
  Bottom 0.1: v8.55,21.35 9.25,21.35 v9.5,21.1
N$82  (via drill 0.1)
  Top 0.1: v4.3,5.6 U1.L17
  Bottom 0.1: v4.3,5.6 2.35,5.6 0.4,7.55 0.4,10.75 0.85,11.2 15.6,11.2 16.3,10.5 J6.13
N$83
  Top 0.1: U1.N3 12.3,8.1 13.75,9.55 13.75,10.5 J6.11
N$84  (via drill 0.1)
  Top 0.1: U1.N4 11.8,8.1 v12.35,8.65
  Bottom 0.1: v12.35,8.65 12.85,8.65 14,9.8 14.35,9.8 J6.12
N$85  (via drill 0.1, 0.1 layers 1-15)
  Top 0.1: U1.N5 11.35,7.6 11.55,7.8 11.55,8.1 v10,9.65 | v5.4,8.35 3.9,8.35 3.5,8.75 1.5,8.75 1.1,8.35 U$2.1
  Route2 0.1: v9.15,9.65 7.8,8.3 v7.25,8.3
  Route15 0.1: v7.25,8.3 5.45,8.3 v5.4,8.35
  Bottom 0.1: v9.15,9.65 v10,9.65
N$86  (via drill 0.1)
  Top 0.1: v10.3,7.95 U1.N7 | v7.6,9.65 v8.65,9.65
  Bottom 0.1: v10.3,7.95 9.2,7.95 8.6,8.55 8.6,9.6 v8.65,9.65 | v7.6,9.65 4.5,9.65 3.65,10.5 J6.3
N$87
  Top 0.102: U1.N9 9.3,9 9,9.3 7.37,9.3 J6.5
N$88  (via drill 0.1)
  Top 0.1: v8.3,8.1 U1.N11
  Bottom 0.1: v8.3,8.1 8.3,10.1 J6.7
N$131
  Top 0.1: S4.T1 15.05,22.2 15.05,21.75 15.8,21 16.15,21 16.35,20.8 16.35,17.85 15.9,17.4 15.87,17.38
  Top 0.102: R7.2 16.76,16.49 15.87,17.38 U3.11
N$132  (via drill 0.1)
  Top 0.1: U3.10 15.1,16.7 15.55,16.7 16.15,16.1 17.5,16.1 17.65,16.25 17.65,17.9 17.25,18.3 17.25,18.7 R6.2 17.2,18.75 v16.85,19.1 | S4.T2 14.4,21.55 v14.5,21.45
  Bottom 0.1: v16.85,19.1 v14.5,21.45
N$133  (via drill 0.1)
  Top 0.1: R5.2 13.4,22.6 13.75,22.25 S4.T3 13.8,22.2 13.8,21.65 v14.4,21.05 | v14.15,18.4 14.15,16.55 14.6,16.1 15.05,16.1 U3.9
  Bottom 0.1: v14.4,21.05 14.4,18.65 v14.15,18.4
N$135  (via drill 0.1)
  Top 0.102: v15.45,23.35 15.05,23.35 S4.B1 | v10.7,19.8 10.35,19.8 9.9,19.35 9.45,19.35 U3.3
  Bottom 0.102: v15.45,23.35 14.25,23.35 v10.7,19.8
N$136  (via drill 0.1)
  Top 0.1: S4.B2 14.4,23.55 v13.95,24 | v10.7,20.75 9.55,20.75 9.45,20.65 U3.1 | v11.85,21.45 14.6,18.7 15.05,18.7 U3.13
  Bottom 0.1: v10.7,20.75 11.62,21.68 | 11.62,21.68 v13.95,24 | 11.62,21.68 v11.85,21.45
REF  (via drill 0.1)
  Top 0.102: U1.M1 14.2,7.1 v15.05,7.95 | v1.9,2.95 1.9,5.35 1.7,5.55 v1.7,7.95 | v17.4,9 17.4,9.35 18.3,10.25 18.3,10.75 17.85,11.2 3.1,11.2 2.4,10.5 J6.2
  Bottom 0.102: 16.4,7.95 v15.05,7.95 | 16.4,7.95 16.7,7.65 J5.6 16.75,7.1 17.1,7.1 J5.4 17.15,7.1 17.5,7.1 J5.2 | J5.75 2.35,2.1 J5.77 J5.79 v1.9,2.95 | v1.7,7.95 1.7,8.05 2.35,8.7 J6.2 | v17.4,9 16.4,8 16.4,7.95
REF_A  (via drill 0.1)
  Top 0.1: v10.35,18.7 9.45,18.7 U3.4 | REF.1 v15.5,21.8 | v5.75,17.4 4,17.4 2.4,15.8 2.4,14 J4.2
  Bottom 0.1: v15.5,21.8 14.35,21.8 11.25,18.7 v10.35,18.7 9.05,17.4 v5.75,17.4
VCC  (via drill 0.1)
  Top 0.102: U2.15 2.7,27.15 3.3,27.15 U2.14 3.35,27.2 3.35,27.4 v3.65,27.7 | C1.1 1.25,18.1 1.8,17.55 2.8,17.55 3.85,18.6 3.85,19.45 C3.1 3.85,19.5 3.65,19.7 v3.65,20.5 4.25,20.5 4.5,20.75 v5.15,20.75 | v7.3,22.2 7.7,22.2 S2.T6 | v16,20.65 15.1,20.65 U3.16 15.05,20.65 14.3,20.65 12.75,22.2 v11.3,22.2
  Bottom 0.102: v3.65,20.5 v3.65,27.7 | v5.15,20.75 6.6,22.2 v7.3,22.2 v11.3,22.2 | VDD.1 16,22.8 v16,20.65 16,20.6 17.55,19.05 17.55,14 J4.14
VCC_B  (via drill 0.1)
  Top 0.1: U1.M2 U1.N2 12.9,7.6 13.3,8 14.3,8 15.3,9 16.3,9 16.32,8.97 | 16.32,8.97 16.85,8.45 C4.1 16.9,8.45 17.55,7.8 17.55,5.15 17,4.6 R4.1 | U1.M15 U1.N15 6.3,7.95 4.45,9.8 0.85,9.8 0.4,10.25 0.4,11.35 0.6,11.55 v1.7,11.55 | 16.32,8.97 16.35,9 16.35,9.3 17.55,10.5 J6.14
  Bottom 0.1: v1.7,11.55 16.5,11.55 17.55,10.5 J6.14
XOUT  (via drill 0.1)
  Top 0.1: U2.12 4.9,26.25 5,26.25 5.4,25.85 5.4,21.8 5,21.4 CX.1 5.05,21.4 5.5,20.95 5.5,20.6 v5,20.1
  Bottom 0.1: J4.11 13.45,14 10.75,16.7 4.75,16.7 4.55,16.9 4.55,19.65 v5,20.1
YOUT  (via drill 0.1, 0.1 layers 1-15)
  Top 0.1: 4.08,24.27 3.65,23.85 3.65,22.95 2.65,21.95 1.75,21.95 1.2,21.4 CY.1 | 4.08,24.27 4.75,24.95 4.85,24.95 U2.10 | 4.08,24.27 v5.05,23.3
  Route15 0.1: v5.05,23.3 v10.35,18
  Bottom 0.1: J4.12 14.75,14 10.75,18 v10.35,18
ZOUT
  Top 0.1: U2.8 4,23.4 4,22.25 4.4,21.85 4.4,20.95 4.3,20.85 2.65,20.85 1.25,19.45 CZ.1 1.2,19.45 0.7,18.95 0.7,17.65 1.05,17.3 1.05,16.2 U$1.1

## Text on the board
bPlace: 2019, Matthias Klumpp | intantech.com | v1.0